# Altium PCB Counters.PcbDoc
Units mm, origin at the board's own origin, x right, y up, seen from the top; angles counter-clockwise.
Board outline 100 x 100 mm, 2 copper layers (Top Layer, Bottom Layer); 41 components, 34 nets, 238 pads, 58 vias.
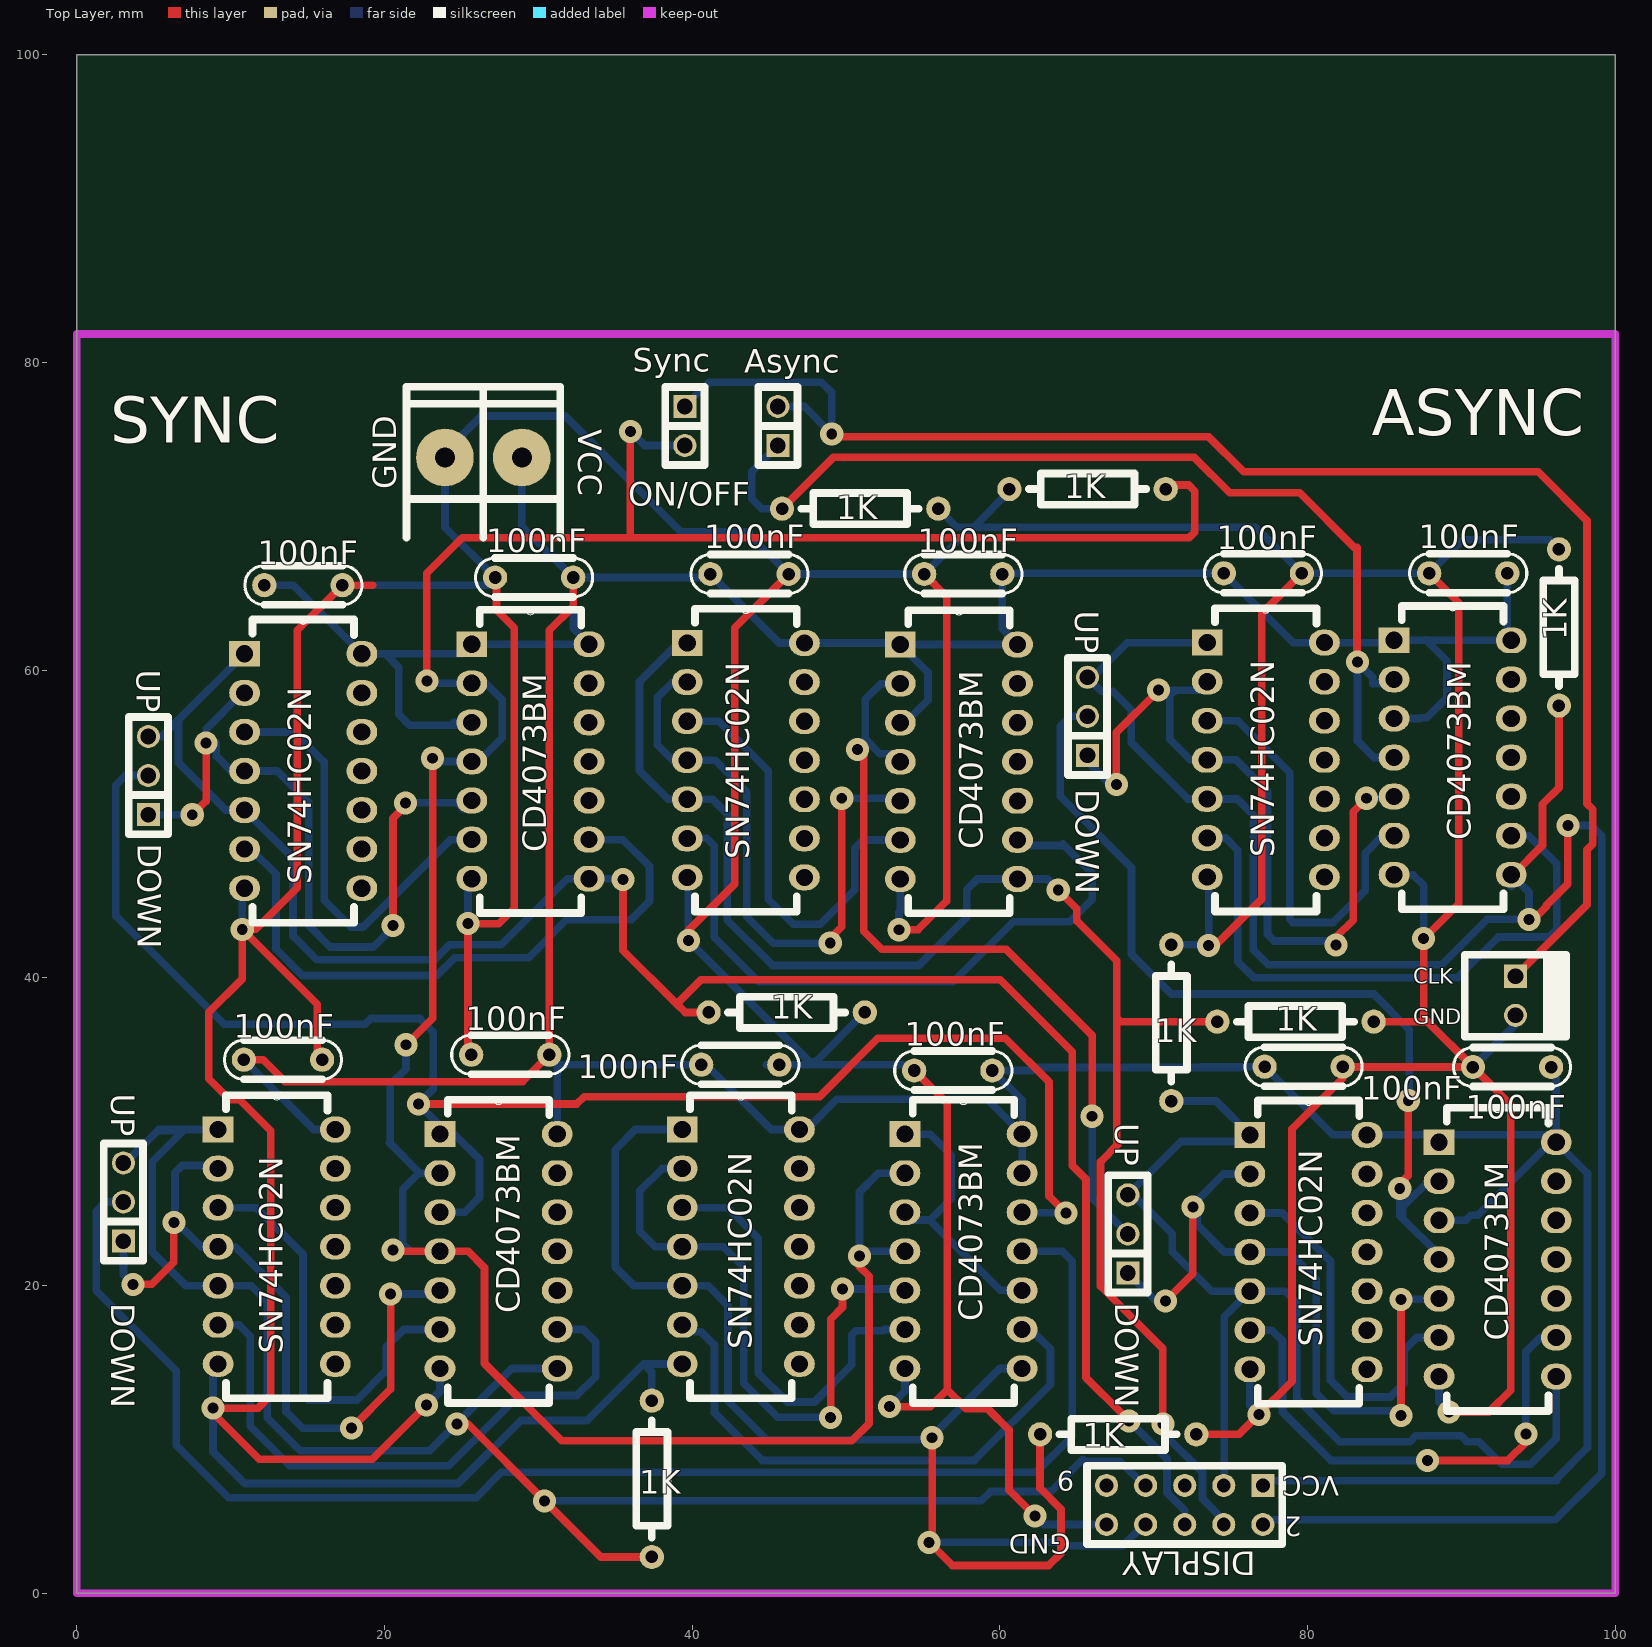
[diagram p0: Top Layer view]
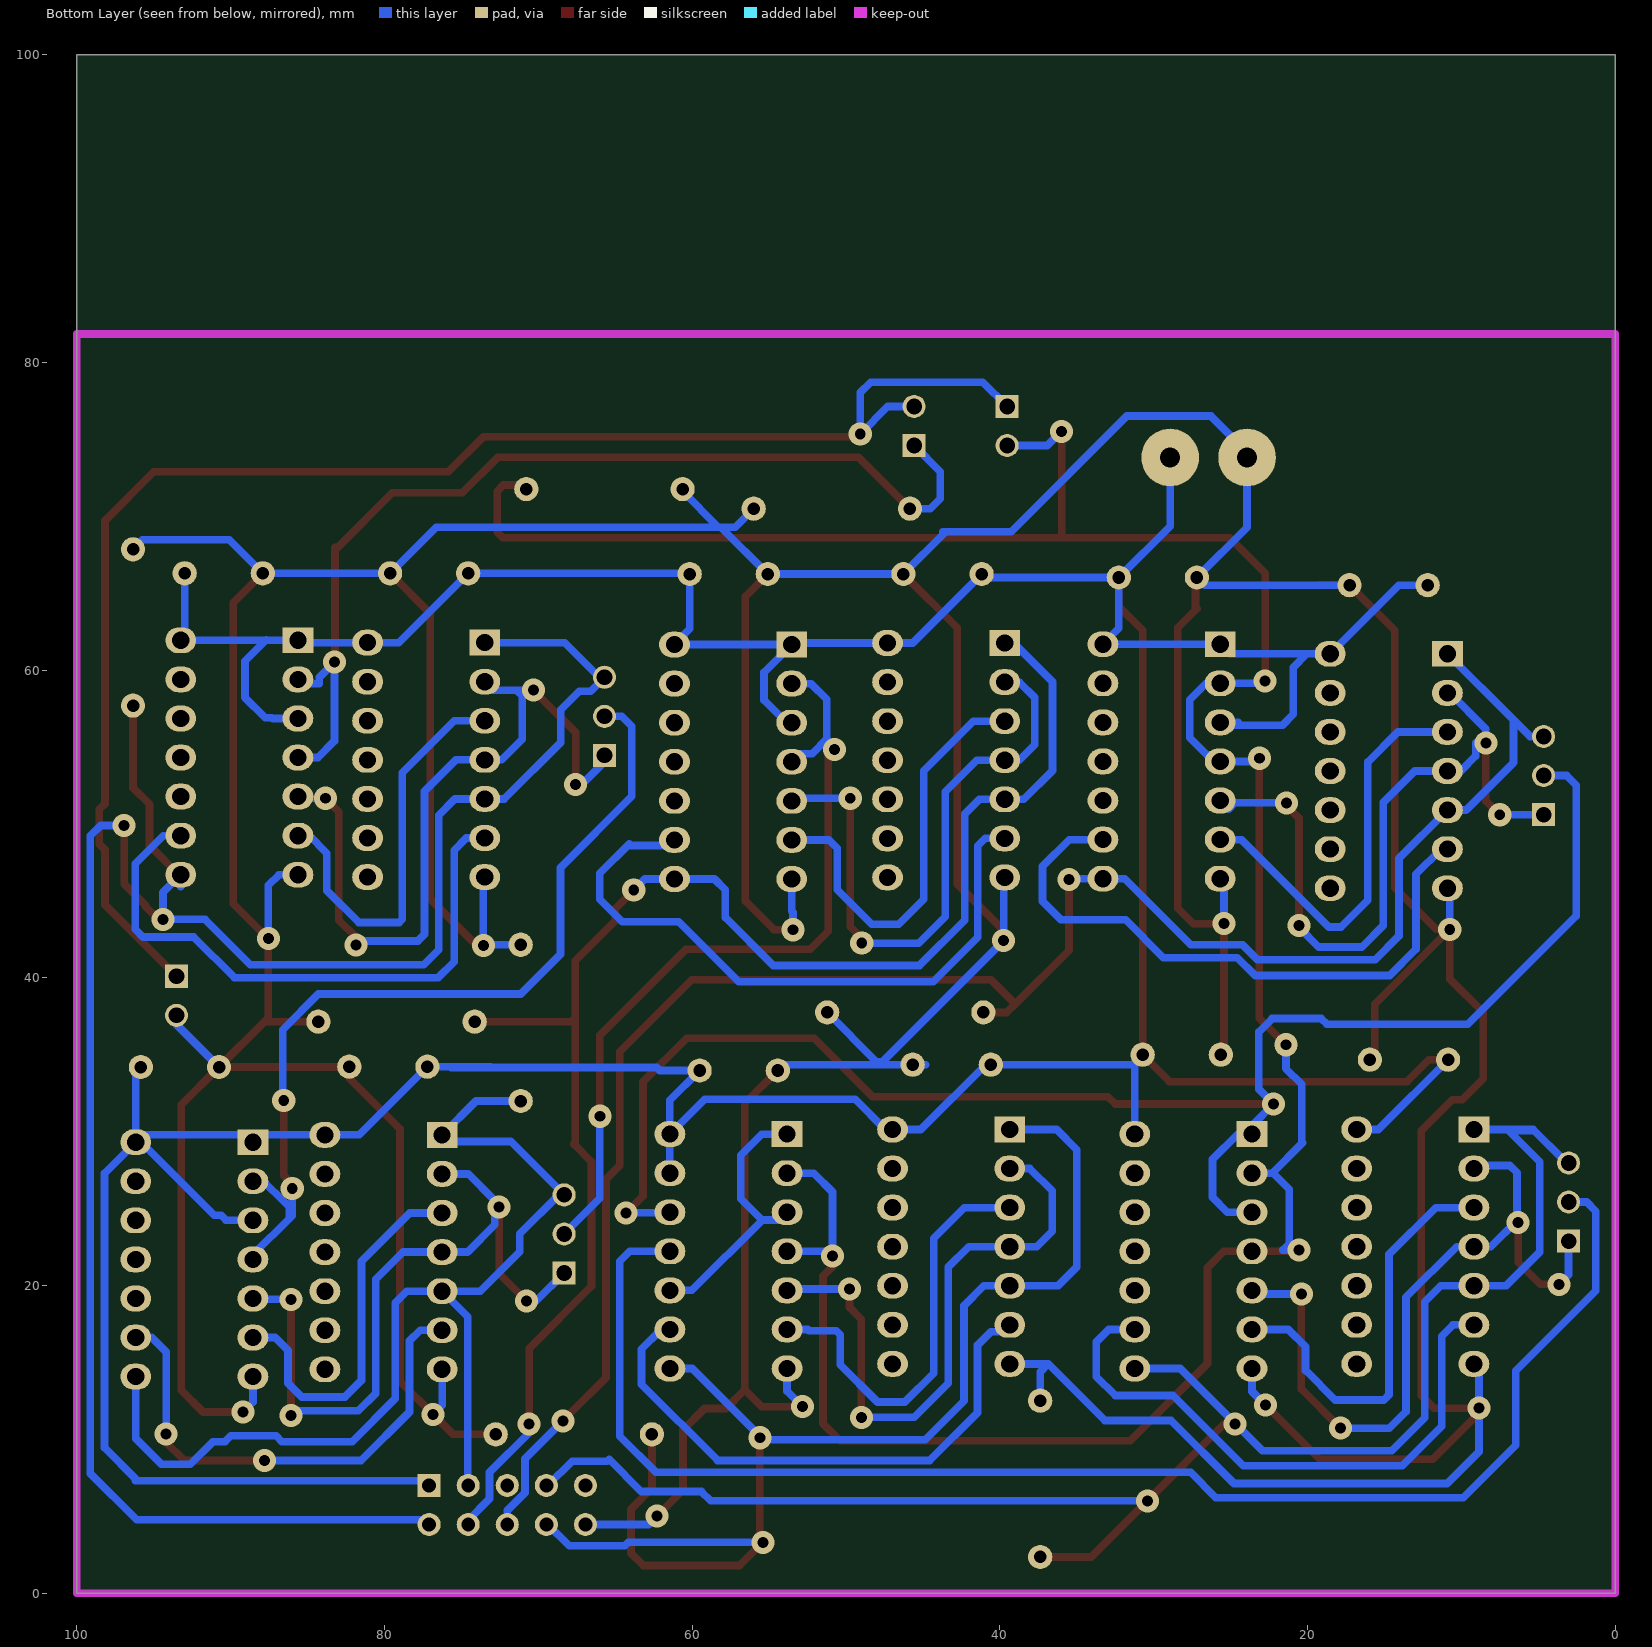
[diagram p1: Bottom Layer view, seen from below]
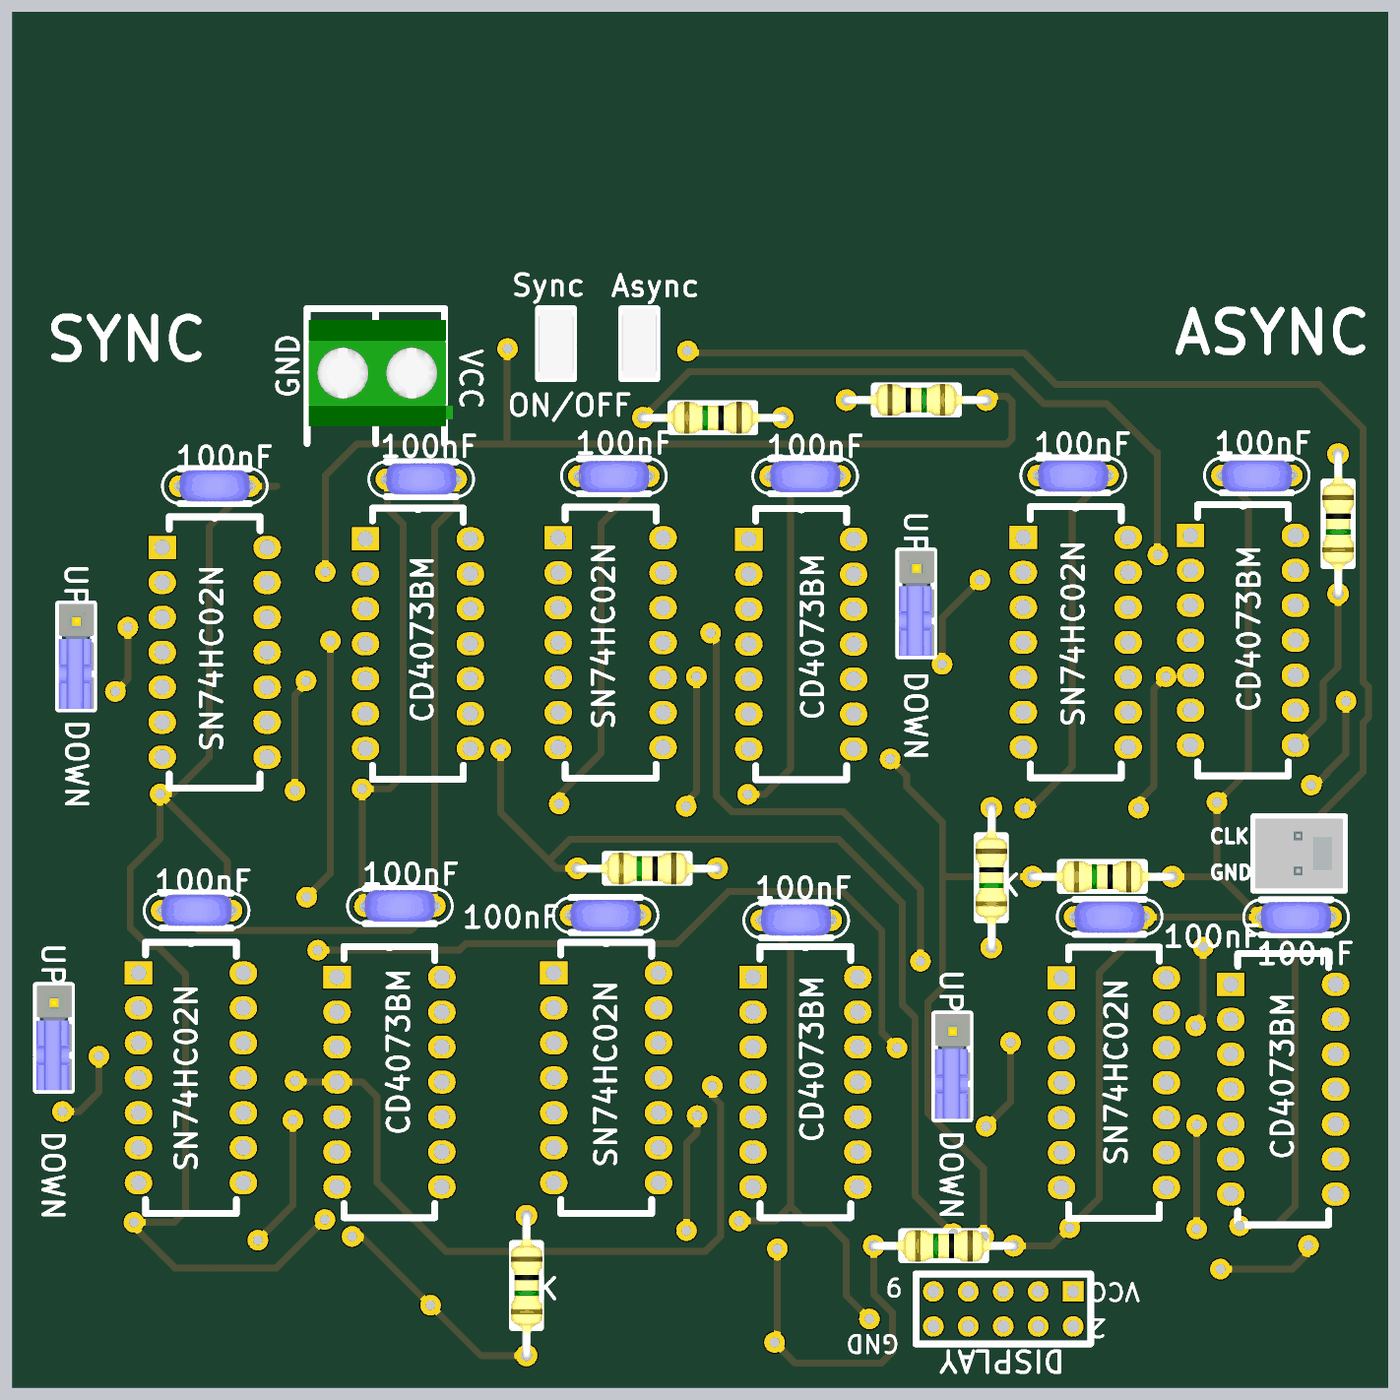
[diagram p2: 3D render of the assembled board from above, using the file's embedded part models]

## Layer stack, top to bottom
Top Solder: solder mask 0.0102, Solder Resist, Dk 3.5
Top Layer: signal copper 0.0356
Dielectric 1: dielectric 0.32, FR-4, Dk 4.8
Bottom Layer: signal copper 0.0356
Bottom Solder: solder mask 0.0102, Solder Resist, Dk 3.5

## Board outline
0,0 0,100 100,100 100,0

## Design rules (kind name [scope] priority, off if disabled: settings)
Clearance [All] p1: gap=0.254 ignorepadtopadclearanceinfootprint=FALSE except(0: Arc-Hole Track-Hole SMDPad-Hole THPad-Hole Via-Hole Fill-Hole Poly-Hole Region-Hole Text-Hole)
PolygonConnect [All] p1: connectstyle=Relief reliefconductorwidth=0.254 reliefentries=4 polygonreliefangle="90 Angle" airgapwidth=0.254
RoutingVias [All] p1: holewidth=0.711 width=1.27 viastyle="Through Hole" minholewidth=0.711 minwidth=1.27 maxholewidth=0.711 maxwidth=1.27
SolderMaskExpansion [All] p1: expansion=0.102
Width [All] p1: maxlimit=0.6 minlimit=0.3 preferedwidth=0.4
30 further rules are at their usual default settings.

## Classes and differential pairs
component class Counters: 1K DISPLAY VCC
component class U_JK_FF1: CD4073BM SN74HC02N
component class U_Sync: UP UP-COUNT
channel class JK_FF: U_JK_FF1 U_JK_FF2 U_JK_FF3 U_JK_FF4 U_JK_FF5

## Components (designator, comment, footprint, x,y, rotation, side; value= is the part's Value field where it differs from the comment)
1K "RES" RES400 56,70.5 r180 top (schematic designator R1)
1K "RES" RES400 60.625,71.775 r0 top (schematic designator R2)
1K "RES" RES400 96.35,67.86 r270 top (schematic designator R3)
1K "RES" RES400 71.15,42.15 r270 top (schematic designator R4)
1K "RES" RES400 84.3,37.15 r180 top (schematic designator R5)
1K "RES" RES400 51.225,37.75 r180 top (schematic designator R6)
1K "RES" RES400 37.375,12.51 r270 top (schematic designator R7)
1K "RES" RES400 72.775,10.325 r180 top (schematic designator R8)
100nF "CAP" CAP200 29.725,66.025 r180 top (schematic designator CAP_D1)
100nF "CAP" CAP200 28.175,35 r180 top (schematic designator CAP_D1)
100nF "CAP" CAP200 77.1,66.3 r0 top (schematic designator CAP_D1)
100nF "CAP" CAP200 79.75,34.225 r0 top (schematic designator CAP_D1)
100nF "CAP" CAP200 43.725,66.25 r0 top (schematic designator CAP_D1)
100nF "CAP" CAP200 14.725,65.525 r180 top (schematic designator CAP_D2)
100nF "CAP" CAP200 13.4,34.675 r180 top (schematic designator CAP_D2)
100nF "CAP" CAP200 90.45,66.3 r0 top (schematic designator CAP_D2)
100nF "CAP" CAP200 93.3,34.2 r0 top (schematic designator CAP_D2)
100nF "CAP" CAP200 57.625,66.25 r0 top (schematic designator CAP_D2)
100nF "CAP" CAP200 56.975,33.975 r180 top (schematic designator CAP_D3)
100nF "CAP" CAP200 43.125,34.35 r0 top (schematic designator CAP_D4)
Async "JUMPER" JUMPER2 45.575,75.875 r90 top (schematic designator J1)
CD4073BM "CD4073BM" *SOIC127P600X175-14N 33.296,46.446 r0 top (schematic designator AND1)
CD4073BM "CD4073BM" *SOIC127P600X175-14N 31.225,14.6 r0 top (schematic designator AND1)
CD4073BM "CD4073BM" *SOIC127P600X175-14N 93.25,46.7 r0 top (schematic designator AND1)
CD4073BM "CD4073BM" *SOIC127P600X175-14N 96.175,14.075 r0 top (schematic designator AND1)
CD4073BM "CD4073BM" *SOIC127P600X175-14N 61.15,46.425 r0 top (schematic designator AND1)
CD4073BM "CD4073BM" *SOIC127P600X175-14N 61.45,14.6 r0 top (schematic designator AND2)
CLK "GND" MOLEX2 93.525,40.1 r270 top (schematic designator J1)
DISPLAY "Header 5X2" HDR2X5 77.1,7 r180 top (schematic designator P2)
SN74HC02N "SN74HC02N" *DIP254P762X508-14 18.525,45.825 r0 top (schematic designator NOR1)
SN74HC02N "SN74HC02N" *DIP254P762X508-14 16.8,14.9 r0 top (schematic designator NOR1)
SN74HC02N "SN74HC02N" *DIP254P762X508-14 81.1,46.55 r0 top (schematic designator NOR1)
SN74HC02N "SN74HC02N" *DIP254P762X508-14 83.875,14.55 r0 top (schematic designator NOR1)
SN74HC02N "SN74HC02N" *DIP254P762X508-14 47.3,46.525 r0 top (schematic designator NOR1)
SN74HC02N "SN74HC02N" *DIP254P762X508-14 46.975,14.9 r0 top (schematic designator NOR2)
Sync "JUMPER" JUMPER2 39.525,75.875 r270 top (schematic designator J2)
UP "DOWN" JUMPER3 3.025,25.425 r90 top (schematic designator J4)
UP "DOWN" JUMPER3 4.65,53.15 r90 top (schematic designator J3)
UP "DOWN" JUMPER3 68.325,23.35 r90 top (schematic designator J2)
UP "DOWN" JUMPER3 65.7,57 r90 top (schematic designator J1)
VCC "GND" BORNERA2 26.425,73.825 r270 top

## Footprints (in the part's own frame and the unit in brackets; to place one, negate y for a bottom-side part, rotate by r counter-clockwise, add the part's x,y. Pads: shape width x height; smd on the part's side, far side on the other; paste and mask are expansions set on the pad)
*DIP254P762X508-14 [mil]
  rect 78.74x66 hole 44: 1(-300,600)
  oval 78.74x66 hole 44: 2(-300,500) 3(-300,400) 4(-300,300) 5(-300,200) 6(-300,100) 7(-300,0) 8(0,0) 9(0,100) 10(0,200) 11(0,300) 12(0,400) 13(0,500) 14(0,600)
  silkscreen extent -280,-88 -20,688
*SOIC127P600X175-14N [mil]
  rect 78.74x66 hole 44: 1(-300,600)
  oval 78.74x66 hole 44: 2(-300,500) 3(-300,400) 4(-300,300) 5(-300,200) 6(-300,100) 7(-300,0) 8(0,0) 9(0,100) 10(0,200) 11(0,300) 12(0,400) 13(0,500) 14(0,600)
  silkscreen extent -280,-88 -20,688
BORNERA2 [mm] "Bornera con Tornillos 5mm separación"
  round 3.75 hole 1.3: 1(0,2.5) 2(0,-2.5)
  silkscreen extent -4.6,-5 5.2,5, body extent -3.76,-4.89 3.94,5.61, height 10
CAP200 [mil]
  round 62 hole 32: 1(-100,0) 2(100,0)
  silkscreen extent -150,-50 150,50, body extent -110,-46 110,44, height 246
HDR2X5 [mm] "Connector; Header; 5x2 Position"
  rect 1.5x1.5 hole 0.9: 1(0,0)
  round 1.5 hole 0.9: 2(0,2.54) 3(2.54,0) 4(2.54,2.54) 5(5.08,0) 6(5.08,2.54) 7(7.62,0) 8(7.62,2.54) 9(10.16,0) 10(10.16,2.54)
  silkscreen extent -1.27,-1.27 11.43,3.81
JUMPER2 [mm]
  rect 1.5x1.5 hole 1.016: 1(-1.27,0)
  round 1.5 hole 1.016: 2(1.27,0)
  silkscreen extent -2.54,-1.27 2.54,1.27, body extent -2.46,-1.27 2.54,1.27, height 9.5
JUMPER3 [mm]
  rect 1.5x1.5 hole 1.016: 1(-2.54,0)
  round 1.5 hole 1.016: 2(0,0) 3(2.54,0)
  silkscreen extent -3.81,-1.27 3.81,1.27, body extent -3.81,-1.3 3.81,1.27, height 16.15
MOLEX2 [mm]
  rect 1.5x1.5 hole 1.016: 1(0,0)
  round 1.5 hole 1.016: 2(2.54,0)
  silkscreen extent -1.4,-3.3 3.94,3.3, body extent -1.27,-3.18 3.81,3.18, height 10.74
RES400 [mil]
  round 62 hole 32: 1(0,0) 2(400,0)
  silkscreen extent 50,-40 350,40, body extent -12,-45 412,46, height 96

## Part data
CD4073BM CD4073BM CD4073BM CD4073BM CD4073BM CD4073BM: "IC: digital; AND; Channels: 3; Inputs: 3; CMOS; SMD; SOP1"
CLK: library part MOLEX2
DISPLAY: "Header, 5-Pin, Dual row"
SN74HC02N SN74HC02N SN74HC02N SN74HC02N SN74HC02N SN74HC02N: "IC: digital; Channels: 4; NOR; Inputs: 2; THT; DIP14; Ser"
UP UP UP UP: library part JUMPER3
VCC: library part "BORNERA 2"

## Via types
v1: diameter 1.5, hole 0.711, Top Layer to Bottom Layer, 58 vias

## Nets (pads, with @x,y where several pads share a name; then routed paths per layer and width w, separated by ;. In a path a pad name is that pad's centre, name@x,y a point inside that pad or via, vN(x,y) a via of type N, cw(c..) or ccw(c..) an arc to the next point about the centre after c; other vN are vias at no path point)
GND: 1K.1 100nF.1@15.94,34.675 100nF.1@17.265,65.525 100nF.1@55.085,66.25 100nF.1@87.91,66.3 100nF.1@90.76,34.2 100nF.2@25.635,35 100nF.2@27.185,66.025 100nF.2@45.665,34.35 100nF.2@46.265,66.25 100nF.2@54.435,33.975 100nF.2@79.64,66.3 100nF.2@82.29,34.225 CD4073BM.7 CLK.2 DISPLAY.10 SN74HC02N.7 VCC.2 | length 568.7
  Top Layer w0.5: v1@8.725,11.825 11.85,8.7 19.2,8.7 v1(22.725,12.225) ; v1(8.85,12.025) 11.775,12.025 12.6,12.85 12.6,30.05 10.575,32.075 9.95,32.075 8.575,33.45 8.575,37.75 10.75,39.925 v1(10.75,43.15) ; 100nF.1@15.94,34.675 15.625,34.99 15.625,38.275 v1(10.75,43.15) ; 19.225,65.525 17.265,65.525 14.325,62.585 14.325,45.85 11.625,43.15 v1(10.75,43.15) ; 100nF.2@25.425,34.735 v1(25.425,43.525) 27.425,43.525 28.425,44.525 28.425,62.75 27.185,63.99 ; 27.275,64.05 100nF.2@27.275,66.085 ; v1(39.75,42.425) 39.75,43.075 42.775,46.1 42.775,62.76 100nF.2@46.265,66.25 ; v1(52.825,12.125) 55.475,12.125 56.575,13.225 ; v1(53.45,43.125) 54.675,43.125 56.55,45 56.55,64.785 100nF.1@55.085,66.25 ; 100nF.2@54.435,33.975 56.575,31.835 56.575,13.225 ; v1(62.3,5) 60.6,6.7 60.6,10.6 59.2,12 57.8,12 56.575,13.225 ; 1K.1@72.775,10.325 75.55,10.325 v1(76.85,11.625) 79,13.775 79,30.175 82.29,33.465 82.29,34.225 82.315,34.2 100nF.1@90.76,34.2 ; v1(73.575,42.1) 74,42.1 77.025,45.125 77.025,63.685 100nF.2@79.64,66.3 ; 1K.1@84.3,37.15 87.79,37.15 87.8,37.16 ; 100nF.1@87.91,66.3 89.825,64.385 89.825,44.825 v1(87.55,42.55) 87.55,37.41 87.8,37.16 ; v1(89.2,11.775) 91.8,11.775 93.225,13.2 93.225,31.735 100nF.1@90.76,34.2 ; 87.8,37.16 100nF.1@90.76,34.2
  Bottom Layer w0.5: SN74HC02N.7@9.18,14.9 8.85,14.57 v1(8.85,12.025) 8.85,9.2 10.925,7.125 24.775,7.125 28.875,11.225 33.175,11.225 36.85,14.9 ; v1(10.75,43.15) 10.75,45.67 SN74HC02N.7@10.905,45.825 ; 100nF.1@17.265,65.525 26.685,65.525 27.185,66.025 23.925,69.285 VCC.2 23.925,74.175 26.275,76.525 31.75,76.525 39.268,69.007 43.692,69.007 43.6,68.915 46.265,66.25 55.085,66.25 58.135,69.3 ; v1(22.725,12.225) 23.605,13.105 CD4073BM.7@23.605,14.6 ; v1(25.425,43.525) 25.425,46.195 CD4073BM.7@25.676,46.446 ; 1K.1@37.375,12.51 37.375,14.375 36.85,14.9 ; SN74HC02N.7@39.355,14.9 36.85,14.9 ; SN74HC02N.7@39.68,46.525 39.75,46.455 v1(39.75,42.425) 47.625,34.55 48.025,34.55 1K.1@51.225,37.75 ; 44.825,34.35 45.665,34.35 54.06,34.35 100nF.2@54.435,33.975 ; v1(52.825,12.125) 53.83,13.13 CD4073BM.7@53.83,14.6 ; v1(53.45,43.125) 53.45,44.25 53.53,44.33 CD4073BM.7@53.53,46.425 ; 1K.1@56,70.5 57.2,69.3 58.135,69.3 ; 1K.1@60.625,71.775 60.625,71.625 58.3,69.3 ; v1(62.3,5) 62.84,4.46 DISPLAY.10@66.84,4.46 ; 1K.1@71.15,42.15 73.525,42.15 v1(73.575,42.1) SN74HC02N.7@73.575,46.455 ; SN74HC02N.7@76.255,14.55 76.255,12.22 v1(76.85,11.625) ; CD4073BM.7@85.63,46.7 86.855,46.7 87.55,46.005 v1(87.55,42.55) ; CD4073BM.7@88.555,14.075 88.555,12.42 v1(89.2,11.775) v1@89.2,11.875 ; 100nF.1@90.76,34.2 93.525,36.965 CLK.2 ; 1K.1@96.35,67.86 95.735,68.475 90.085,68.475 87.91,66.3 79.64,66.3 76.64,69.3 58.3,69.3 ; 58.135,69.3 58.3,69.3
NetAND1_U_JK_FF1_2: 1K.2@70.785,71.775 CD4073BM.2@23.605,27.3 CD4073BM.2@25.676,59.146 CD4073BM.2@53.83,27.3 CD4073BM.4@23.605,22.22 CD4073BM.4@25.676,54.066 CD4073BM.4@53.83,22.22 Sync.2 | length 185.5
  Top Layer w0.5: v1(20.55,22.3) 20.63,22.22 23.605,22.22 25.43,22.22 26.5,21.15 26.5,14.925 31.525,9.9 50.375,9.9 51.5,11.025 51.5,20.6 50.875,21.225 v1(50.875,21.925) ; v1(21.4,35.65) 23.125,37.375 v1(23.125,54.275) ; v1(22.75,59.3) 22.75,66.3 25.05,68.6 35.975,68.6 ; v1@35.975,75.35 35.975,68.6 ; 1K.2@70.675,71.525 71.19,72.04 72.275,72.04 72.675,71.64 72.675,68.975 72.3,68.6 35.975,68.6
  Bottom Layer w0.5: 20.325,29.275 22.3,27.3 ; 20.375,29.275 20.375,33.075 21.4,34.1 v1(21.4,35.65) ; v1(20.55,22.3) 21.6,22.3 21.175,22.725 21.175,26.25 22.225,27.3 22.3,27.3 ; v1(22.75,59.3) 22.904,59.146 25.676,59.146 26.579,59.146 27.65,58.075 27.65,55.6 26.116,54.066 25.676,54.066 v1@23.091,54.066 ; CD4073BM.2@23.605,27.3 22.3,27.3 ; v1(36,75.525) 36.92,74.605 Sync.2 ; v1(50.875,21.925) 50.875,26.075 52.1,27.3 CD4073BM.2@53.83,27.3 ; v1@51.055,22.22 CD4073BM.4@53.83,22.22
NetAND1_U_JK_FF1_5: CD4073BM.5@25.676,51.526 SN74HC02N.2@10.905,58.525 SN74HC02N.4@10.905,53.445 UP.1@4.65,50.61 | length 48.1
  Top Layer w0.5: v1(7.5,50.6) 8.4,51.5 v1(8.4,55.275) ; v1(20.55,43.4) 20.55,50.375 v1@21.45,51.275
  Bottom Layer w0.5: UP.1@4.65,50.61 4.66,50.6 v1(7.5,50.6) ; v1(8.4,55.275) 8.4,56.175 10.75,58.525 SN74HC02N.2@10.905,58.525 ; v1@9.05,55.275 9.05,54.425 10.03,53.445 10.905,53.445 13.03,53.445 15.075,51.4 15.075,43.4 16.475,42 19.275,42 20.55,43.275 v1(20.55,43.4) ; v1(21.35,51.375) 24.725,51.375 25.125,50.975 CD4073BM.5@25.676,51.526
NetAND1_U_JK_FF1_6: CD4073BM.6@25.676,48.986 SN74HC02N.3@10.905,55.985 | length 27.6
  Bottom Layer w0.5: SN74HC02N.3@10.905,55.985 14.115,55.985 16.075,54.025 16.075,45.05 17.825,43.3 18.6,43.3 24.286,48.986 CD4073BM.6@25.676,48.986
NetAND1_U_JK_FF1_8: 1K.2@41.065,37.75 CD4073BM.8@33.296,46.446 DISPLAY.6 SN74HC02N.1@10.905,61.065 SN74HC02N.5@10.905,50.905 UP.3@4.65,55.69 | length 124
  Top Layer w0.5: v1(35.5,46.4) 35.5,41.8 39,38.3 ; 1K.2@41.065,37.75 39.55,37.75 39,38.3 ; v1@67.95,11.65 65.6,14 65.6,26.9 64.7,27.8 64.7,35.2 60.025,39.875 40.575,39.875 39,38.3
  Bottom Layer w0.5: UP.3@4.65,55.69 5.53,55.69 6.6,56.76 ; SN74HC02N.1@10.905,61.065 6.6,56.76 ; v1(35.5,46.4) 35.454,46.446 33.296,46.446 31.871,46.446 27.575,42.15 24.225,42.15 23.25,41.175 15.6,41.175 14.05,42.725 14.05,47.76 10.905,50.905 9.695,50.905 6.6,54 6.6,56.76 ; v1@68.4,11.1 v1(68.4,11.2) 70.866,8.734 70.866,6.522 72.02,5.368 DISPLAY.6
NetAND1_U_JK_FF1_9: CD4073BM.9@33.296,48.986 SN74HC02N.6@10.905,48.365 | length 41.5
  Bottom Layer w0.5: SN74HC02N.6@10.905,48.365 11.31,48.365 12.95,46.725 12.95,41.85 14.65,40.15 23.4,40.15 24.563,41.313 29.363,41.313 31.825,43.775 36.025,43.775 37.225,44.975 37.225,47.25 35.489,48.986 CD4073BM.9@33.296,48.986
NetAND1_U_JK_FF2_1: CD4073BM.1@23.605,29.84 CD4073BM.3@23.605,24.76 CD4073BM.12@61.45,24.76 UP.2@4.65,53.15 | length 106.7
  Top Layer w0.5: v1(22.2,31.8) 32.5,31.8 32.975,32.275 48.275,32.275 52.075,36.075 60.35,36.075 63.2,33.225 63.2,25.8 v1(64.3,24.7)
  Bottom Layer w0.5: UP.2@4.65,53.15 3.15,53.15 2.525,52.525 2.525,44.025 9.575,36.975 18.725,36.975 19.1,37.35 22.3,37.35 23.175,36.475 23.175,32.775 v1(22.2,31.8) 23.605,30.395 23.605,29.84 24.535,29.84 26.175,28.2 26.175,25.725 25.21,24.76 CD4073BM.3@23.605,24.76 ; CD4073BM.12@61.45,24.76 61.485,24.725 v1@63.9,24.725
NetAND1_U_JK_FF2_5: CD4073BM.5@23.605,19.68 SN74HC02N.2@9.18,27.6 SN74HC02N.4@9.18,22.52 UP.1@3.025,22.885 | length 49.8
  Top Layer w0.5: v1(3.65,20.075) 4.875,20.075 6.3,21.5 v1(6.3,24.1) ; v1(17.85,10.725) 20.4,13.275 v1(20.4,19.45) v1@20.55,19.6
  Bottom Layer w0.5: UP.1@3.025,22.885 3.025,20.7 v1(3.65,20.075) ; SN74HC02N.2@9.18,27.6 8.98,27.8 6.85,27.8 6.375,27.325 6.375,24.225 8.08,22.52 9.18,22.52 10.305,22.52 13.6,19.225 13.6,11.8 14.675,10.725 v1(17.85,10.725) ; v1(20.4,19.45) 23.375,19.45 CD4073BM.5@23.605,19.68
NetAND1_U_JK_FF2_6: CD4073BM.6@23.605,17.14 SN74HC02N.3@9.18,25.06 | length 27.8
  Bottom Layer w0.5: SN74HC02N.3@9.18,25.06 11.665,25.06 14.7,22.025 14.7,12.9 15.05,12.55 18.2,12.55 20.125,14.475 20.125,16.025 21.24,17.14 CD4073BM.6@23.605,17.14
NetAND1_U_JK_FF2_8: 1K.2@37.375,2.35 CD4073BM.8@31.225,14.6 DISPLAY.7 SN74HC02N.1@9.18,30.14 SN74HC02N.5@9.18,19.98 UP.3@3.025,27.965 | length 112.6
  Top Layer w0.5: v1(24.7,11) 25.4,11 v1(30.4,6) 34.05,2.35 1K.2@37.375,2.35
  Bottom Layer w0.5: UP.3@3.375,27.965 3.375,28.19 5.25,30.065 ; SN74HC02N.1@9.18,30.14 5.325,30.14 5.25,30.065 ; v1(30.4,6) 58.8,6 59.4,6.6 63.3,6.6 65.4,8.7 65.52,8.58 67.8,8.58 DISPLAY.7@69.38,7 ; CD4073BM.8@31.225,14.6 28.275,14.6 22.925,9.25 14.525,9.25 12.375,11.4 12.375,18.95 11.345,19.98 9.18,19.98 7.095,19.98 4.9,22.175 4.9,28.05 6.915,30.065 5.25,30.065
NetAND1_U_JK_FF2_9: CD4073BM.9@31.225,17.14 SN74HC02N.6@9.18,17.44 | length 39.3
  Bottom Layer w0.5: SN74HC02N.6@9.18,17.44 10.535,17.44 11.275,16.7 11.275,10.85 13.85,8.275 24.175,8.275 28.75,12.85 32.5,12.85 33.725,14.075 33.725,16.325 32.91,17.14 CD4073BM.9@31.225,17.14
NetAND1_U_JK_FF3_2: 1K.2@45.84,70.5 Async.1 CD4073BM.2@85.63,59.4 CD4073BM.4@85.63,54.32 | length 66
  Top Layer w0.5: 1K.2@45.84,70.5 49.19,73.85 72.625,73.85 74.95,71.525 79.5,71.525 83.05,67.975 83.225,67.975 v1@83.225,60.8
  Bottom Layer w0.5: Async.1 43.875,72.905 43.875,71.15 44.525,70.5 1K.2@45.84,70.5 ; CD4073BM.4@85.63,54.32 84.33,54.32 83.25,55.4 v1(83.25,60.525) 84.25,59.525 84.25,59.125 85.355,59.125 CD4073BM.2@85.63,59.4
NetAND1_U_JK_FF3_5: CD4073BM.5@85.63,51.78 SN74HC02N.2@73.48,59.25 SN74HC02N.4@73.48,54.17 UP.1@65.7,54.46 | length 50.7
  Top Layer w0.5: v1(67.575,52.575) 67.575,55.95 v1(70.325,58.7) ; v1(81.85,42.125) 81.85,42.625 82.975,43.75 82.975,50.8 v1(83.85,51.675)
  Bottom Layer w0.5: UP.1@65.7,54.46 65.7,54.05 v1@67.475,52.275 ; v1(70.325,58.7) 71.425,58.7 ; SN74HC02N.2@73.48,59.25 72.93,58.7 71.425,58.7 ; v1@81.825,42.4 77.825,42.4 77.4,42.825 77.4,52.125 75.355,54.17 73.48,54.17 72.38,54.17 71.05,55.5 71.05,58.325 71.425,58.7 ; v1(83.85,51.675) CD4073BM.5@85.63,51.675
NetAND1_U_JK_FF3_6: CD4073BM.6@85.63,49.24 SN74HC02N.3@73.48,56.71 | length 26.9
  Bottom Layer w0.5: SN74HC02N.3@73.48,56.71 75.465,56.71 78.85,53.325 78.85,43.8 79.05,43.6 81.675,43.6 83.75,45.675 83.75,48.1 84.94,49.29 CD4073BM.6@85.63,49.29
NetAND1_U_JK_FF3_8: 1K.2@96.35,57.7 CD4073BM.8@93.25,46.7 DISPLAY.2 SN74HC02N.1@73.48,61.79 SN74HC02N.5@73.48,51.63 UP.3@65.7,59.54 | length 143.7
  Top Layer w0.5: CD4073BM.8@93.25,46.7 93.375,46.7 95.275,48.6 95.275,51.275 96.35,52.35 1K.2@96.35,57.7 ; v1@94.55,43.65 95.562,44.663 95.525,44.7 96.925,46.1 v1(96.925,49.9)
  Bottom Layer w0.5: SN74HC02N.1@73.48,61.79 68.29,61.79 66.04,59.54 65.7,59.54 66.605,58.635 67.34,58.635 68.55,57.425 68.55,55.3 72.22,51.63 73.48,51.63 75.42,51.63 76.475,50.575 76.475,41.825 77.45,40.85 88.725,40.85 91.675,43.8 v1(94.4,43.8) 94.4,45.55 93.25,46.7 CD4073BM.8@93.25,45.925 ; DISPLAY.2@77.1,4.76 96.11,4.76 99.125,7.775 99.125,49.225 98.45,49.9 v1(96.925,49.9)
NetAND1_U_JK_FF3_9: CD4073BM.9@93.25,49.24 SN74HC02N.6@73.48,49.09 | length 40
  Bottom Layer w0.5: SN74HC02N.6@73.48,49.09 74.685,49.09 75.475,48.3 75.475,41.05 76.525,40 89.75,40 92.4,42.65 95.7,42.65 96.212,43.163 96.212,47.413 94.385,49.24 CD4073BM.9@93.25,49.24
NetAND1_U_JK_FF4_2: CD4073BM.2@88.555,26.775 CD4073BM.4@88.555,21.695 UP.2@65.7,57 | length 57.8
  Top Layer w0.5: v1(86,26.3) 86,26.6 86.55,27.15 v1(86.55,32.025)
  Bottom Layer w0.5: UP.2@65.7,57 64.575,57 63.925,56.35 63.925,51.8 68.563,47.162 68.563,41.537 71.15,38.95 84.3,38.95 86.625,36.625 v1@86.625,32.55 ; v1(86,26.3) 86,24.55 86.175,24.375 ; CD4073BM.2@88.2,27.1 86.175,25.075 86.175,24.375 ; CD4073BM.4@88.53,22.02 86.175,24.375
NetAND1_U_JK_FF4_5: CD4073BM.5@88.555,19.155 SN74HC02N.2@76.255,27.25 SN74HC02N.4@76.255,22.17 UP.1@68.325,20.81 | length 48.5
  Top Layer w0.5: v1(70.775,19) 72.55,20.775 v1(72.55,25.1) ; v1(86.075,11.55) v1(86.075,19.1)
  Bottom Layer w0.5: UP.1@68.325,20.81 70.135,19 v1(70.775,19) ; SN74HC02N.2@76.255,27.25 74.55,27.25 72.825,25.525 72.825,23.95 74.605,22.17 76.255,22.17 78.805,22.17 80.575,20.4 80.575,12.975 81.7,11.85 85.775,11.85 v1(86.075,11.55) ; v1(86.075,19.1) 88.5,19.1 CD4073BM.5@88.555,19.155
NetAND1_U_JK_FF4_6: CD4073BM.6@88.555,16.615 SN74HC02N.3@76.255,24.71 | length 24.6
  Bottom Layer w0.5: SN74HC02N.3@76.255,24.71 78.365,24.71 81.5,21.575 81.5,13.825 82.575,12.75 85.375,12.75 86.275,13.65 86.275,15.775 87.115,16.615 CD4073BM.6@88.555,16.615
NetAND1_U_JK_FF4_8: 1K.2@71.15,31.99 CD4073BM.8@96.175,14.075 DISPLAY.3 SN74HC02N.1@76.255,29.79 SN74HC02N.5@76.255,19.63 UP.3@68.325,25.89 | length 72.4
  Bottom Layer w0.5: 1K.2@71.15,31.99 74.055,31.99 SN74HC02N.1@76.255,29.79 ; DISPLAY.3@74.6,7.3 74.6,17.975 SN74HC02N.5@76.255,19.63 ; SN74HC02N.1@75.83,29.365 71.8,29.365 68.325,25.89 68.66,25.89 71.2,23.35 71.2,22.2 73.77,19.63 SN74HC02N.5@76.255,19.63 ; CD4073BM.8@96.175,14.075 96.175,10.05 94.5,8.375 92.625,8.375 91.15,9.85 90.375,9.85 90,10.225 87.05,10.225 86.675,9.85 82.1,9.85 79.3,12.65 79.3,18.875 78.545,19.63 SN74HC02N.5@76.255,19.63
NetAND1_U_JK_FF4_9: CD4073BM.9@96.175,16.615 SN74HC02N.6@76.255,17.09 | length 32.4
  Top Layer w0.5: v1(87.8,8.625) 93.025,8.625 v1@94.25,9.85
  Bottom Layer w0.5: SN74HC02N.6@76.255,17.09 77.685,17.09 78.375,16.4 78.375,11.775 81.525,8.625 v1(87.8,8.625) ; v1(94.2,10.35) 94.2,15.675 95.14,16.615 CD4073BM.9@96.175,16.615
NetAND1_U_JK_FF5_2: CD4073BM.2@53.53,59.125 CD4073BM.4@53.53,54.045 UP.2@68.325,23.35 | length 52.6
  Top Layer w0.5: v1(50.75,54.85) 51.15,54.45 51.15,43.025 52.325,41.85 60.4,41.85 66,36.25 v1(66,31)
  Bottom Layer w0.5: v1(50.75,54.85) 50.75,55.025 51.25,55.525 ; CD4073BM.4@53.53,54.045 53,54.575 52.2,54.575 51.25,55.525 ; CD4073BM.2@53.53,59.125 52.275,59.125 51.25,58.1 51.25,55.525 ; v1(66,31) 66,25.675 UP.2@68.325,23.35
NetAND1_U_JK_FF5_5: CD4073BM.5@53.53,51.505 SN74HC02N.2@39.68,59.225 SN74HC02N.4@39.68,54.145 | length 40.5
  Top Layer w0.5: v1(48.975,42.25) 48.975,42.575 49.725,43.325 v1(49.725,51.675)
  Bottom Layer w0.5: SN74HC02N.2@39.68,59.225 38.725,59.225 37.725,58.225 37.725,55.15 38.73,54.145 39.68,54.145 41.505,54.145 43.55,52.1 43.55,43.975 45.275,42.25 v1(48.975,42.25) ; v1(49.725,51.675) 53.1,51.675 53.4,51.375 CD4073BM.5@53.53,51.505
NetAND1_U_JK_FF5_6: CD4073BM.6@53.53,48.965 SN74HC02N.3@39.68,56.685 | length 28.1
  Bottom Layer w0.5: SN74HC02N.3@39.68,56.685 41.715,56.685 44.95,53.45 44.95,45.1 46.575,43.475 48.325,43.475 50.575,45.725 50.575,48.425 51.115,48.965 CD4073BM.6@53.53,48.965
NetAND1_U_JK_FF5_8: 1K.2@74.14,37.15 CD4073BM.8@61.15,46.425 DISPLAY.4 SN74HC02N.1@39.68,61.765 SN74HC02N.5@39.68,51.605 | length 103.5
  Top Layer w0.5: v1(63.8,45.7) 65,44.5 65,43.7 67.6,41.1 67.6,37.4 ; 67.6,29.1 67.6,37.4 ; 67.7,29.2 66.55,28.05 66.55,19.95 70.6,15.9 v1(70.6,11) ; 1K.2@74.14,37.15 67.85,37.15 67.6,37.4
  Bottom Layer w0.5: SN74HC02N.1@39.68,61.765 39.09,61.765 36.575,59.25 36.575,53.475 38.445,51.605 39.68,51.605 41.32,51.605 42.275,50.65 42.275,43.75 45.225,40.8 54.725,40.8 57.85,43.925 57.85,45.725 58.55,46.425 61.15,46.425 63.075,46.425 v1(63.8,45.7) ; v1(70.6,11) 70.6,10.426 73.174,7.852 73.174,6.126 74.56,4.74 DISPLAY.4
NetAND1_U_JK_FF5_9: CD4073BM.9@61.15,48.965 SN74HC02N.6@39.68,49.065 | length 43.4
  Bottom Layer w0.5: SN74HC02N.6@39.68,49.065 40.935,49.065 41.425,48.575 41.425,42.65 44.325,39.75 56.975,39.75 60.875,43.65 64.55,43.65 66,45.1 66,46.8 64.1,48.7 ; CD4073BM.9@61.285,49.1 61.15,48.965 61.515,48.6 64,48.6
NetAND2_1: CD4073BM.1@53.83,29.84 CD4073BM.3@53.83,24.76 CD4073BM.10@61.45,19.68 | length 18.1
  Bottom Layer w0.5: CD4073BM.3@53.83,24.76 54.34,24.25 55.45,24.25 ; CD4073BM.1@53.83,29.84 55.485,29.84 56.85,28.475 56.85,25.65 55.45,24.25 ; CD4073BM.10@61.45,19.68 60.02,19.68 55.45,24.25
NetAND2_5: CD4073BM.5@53.83,19.68 SN74HC02N.2@39.355,27.6 SN74HC02N.4@39.355,22.52 | length 40.7
  Top Layer w0.5: v1(49,11.425) 49,17.8 49.775,18.575 v1(49.775,19.775)
  Bottom Layer w0.5: SN74HC02N.2@39.355,27.6 38.05,27.6 36.6,26.15 36.6,23.525 37.605,22.52 39.355,22.52 42.03,22.52 43.35,21.2 43.35,13.65 45.575,11.425 v1(49,11.425) ; v1(49.775,19.775) 53.375,19.775 53.65,19.5 CD4073BM.5@53.83,19.68
NetAND2_6: CD4073BM.6@53.83,17.14 SN74HC02N.3@39.355,25.06 | length 27.9
  Bottom Layer w0.5: SN74HC02N.3@39.355,25.06 42.315,25.06 44.3,23.075 44.3,14.3 46.175,12.425 47.95,12.425 50.375,14.85 50.375,16.8 50.64,17.065 52.405,17.065 52.48,17.14 CD4073BM.6@53.83,17.14
NetAND2_8: 1K.2@62.615,10.325 CD4073BM.8@61.45,14.6 DISPLAY.8 SN74HC02N.1@39.355,30.14 SN74HC02N.5@39.355,19.98 | length 88.3
  Top Layer w0.5: v1(55.6,10.1) 55.6,3.5 v1(55.4,3.3) 56.9,1.8 63.175,1.8 63.975,2.6 63.975,5.45 62.615,6.81 1K.2@62.615,10.325
  Bottom Layer w0.5: SN74HC02N.1@39.355,30.14 36.31,30.14 35,28.83 35,21.2 36.22,19.98 39.355,19.98 41.045,19.98 42.325,18.7 42.325,12.5 44.85,9.975 v1@55.375,9.975 ; v1(55.4,3.3) 64.16,3.3 64.38,3.08 68,3.08 DISPLAY.8@69.38,4.46 ; v1@55.55,10.15 60,14.6 CD4073BM.8@61.45,14.6
NetAND2_9: CD4073BM.9@61.45,17.14 SN74HC02N.6@39.355,17.44 | length 36.9
  Bottom Layer w0.5: SN74HC02N.6@39.355,17.44 39.795,17 40.575,17 41.45,16.125 41.45,11.725 44.55,8.625 58.35,8.625 63.3,13.575 63.3,15.85 62.01,17.14 CD4073BM.9@61.45,17.14
NetAND2_11: CD4073BM.11@61.45,22.22 UP.2@3.025,25.425 | length 95.6
  Bottom Layer w0.5: UP.2@3.025,25.425 1.85,25.425 1.25,24.825 1.25,19.65 6.45,14.45 6.45,9.625 9.875,6.2 25.95,6.2 27.6,7.85 62.35,7.85 64.7,10.2 64.7,21.57 64.05,22.22 CD4073BM.11@61.45,22.22
NetJ1_1: Async.2 CLK.1 Sync.1 | length 100.7
  Top Layer w0.5: v1@49.075,75.185 73.565,75.185 75.85,72.9 95,72.9 98.175,69.725 98.175,51.325 98.55,50.95 98.55,48.7 98.175,48.325 98.175,44.75 CLK.1
  Bottom Layer w0.5: Sync.1 41.105,78.725 48.4,78.725 49.075,78.05 v1(49.075,75.35) 47.28,77.145 Async.2
VCC: 100nF.1@30.715,35 100nF.1@32.265,66.025 100nF.1@40.585,34.35 100nF.1@41.185,66.25 100nF.1@59.515,33.975 100nF.1@74.56,66.3 100nF.1@77.21,34.225 100nF.2@10.86,34.675 100nF.2@12.185,65.525 100nF.2@60.165,66.25 100nF.2@92.99,66.3 100nF.2@95.84,34.2 CD4073BM.1@25.676,61.686 CD4073BM.1@53.53,61.665 CD4073BM.1@85.63,61.94 CD4073BM.1@88.555,29.315 CD4073BM.3@25.676,56.606 CD4073BM.3@53.53,56.585 CD4073BM.3@85.63,56.86 CD4073BM.3@88.555,24.235 CD4073BM.13@61.45,27.3 CD4073BM.14 DISPLAY.1 SN74HC02N.14 VCC.1 | length 344
  Top Layer w0.5: 100nF.2@10.86,34.675 12.11,34.675 13.535,33.25 28.965,33.25 30.715,35 30.715,62.59 32.265,64.14 100nF.1@32.265,66.025
  Bottom Layer w0.5: 100nF.2@10.86,34.675 15.395,30.14 SN74HC02N.14@16.8,30.14 ; 100nF.2@12.185,65.525 14.065,65.525 18.525,61.065 20.035,61.065 ; 24.494,56.606 25.676,56.606 25.495,56.425 21.625,56.425 20.925,57.125 20.925,60.175 20.035,61.065 ; VCC.1 28.925,69.365 100nF.1@32.265,66.025 ; 100nF.1@30.715,35 31.225,34.49 CD4073BM.14@31.225,29.84 ; 31.365,34.35 40.585,34.35 40.925,34.35 45.135,30.14 46.975,30.14 47.44,30.14 49.4,32.1 59.19,32.1 CD4073BM.14@61.45,29.84 ; CD4073BM.3@53.53,56.585 53.86,56.585 55.325,58.05 55.325,59.87 CD4073BM.1@53.53,61.665 ; CD4073BM.14@61.15,61.665 CD4073BM.1@53.53,61.665 ; CD4073BM.14@61.425,61.44 60.165,62.7 60.165,66.25 60.215,66.3 74.56,66.3 79.07,61.79 81.1,61.79 CD4073BM.1@85.63,61.79 ; CD4073BM.13@61.45,27.3 CD4073BM.14@61.45,29.84 ; 73.11,34.225 77.21,34.225 81.645,29.79 83.875,29.79 CD4073BM.14@96.175,29.79 ; 75.66,34.175 62.315,34.175 62.115,33.975 59.515,33.975 61.45,32.04 CD4073BM.14@61.45,29.84 ; DISPLAY.1@77.1,7.3 96.2,7.3 96.2,7.45 98.2,9.45 98.2,27.29 96.175,29.315 CD4073BM.14@96.175,29.64 ; CD4073BM.3@85.63,56.86 87.275,56.86 87.325,56.91 87.76,56.91 89.075,58.225 89.075,60.575 87.71,61.94 ; CD4073BM.1@85.63,61.94 87.71,61.94 ; 87.688,61.963 87.71,61.94 ; CD4073BM.3@88.555,24.235 90.3,24.235 90.625,24.56 91.06,24.56 96.14,29.64 CD4073BM.14@96.175,29.64 ; CD4073BM.14@92.99,62.2 100nF.2@92.99,66.3 ; CD4073BM.14@93.25,61.94 87.71,61.94 ; 100nF.2@95.84,34.2 96.175,33.865 CD4073BM.14@96.175,29.79 ; 20.035,61.065 25.055,61.065 25.676,61.686 33.296,61.686 32.265,62.717 100nF.1@32.265,66.025 ; 100nF.1@32.265,66.025 40.96,66.025 41.185,66.25 45.67,61.765 47.3,61.765 53.43,61.765 CD4073BM.1@53.53,61.665 ; CD4073BM.14@96.175,29.64 CD4073BM.14@96.175,29.79
pads on no net: CD4073BM.10@31.225,19.68 CD4073BM.10@33.296,51.526 CD4073BM.10@61.15,51.505 CD4073BM.10@93.25,51.78 CD4073BM.10@96.175,19.155 CD4073BM.11@31.225,22.22 CD4073BM.11@33.296,54.066 CD4073BM.11@61.15,54.045 CD4073BM.11@93.25,54.32 CD4073BM.11@96.175,21.695 CD4073BM.12@31.225,24.76 CD4073BM.12@33.296,56.606 CD4073BM.12@61.15,56.585 CD4073BM.12@93.25,56.86 CD4073BM.12@96.175,24.235 CD4073BM.13@31.225,27.3 CD4073BM.13@33.296,59.146 CD4073BM.13@61.15,59.125 CD4073BM.13@93.25,59.4 CD4073BM.13@96.175,26.775 DISPLAY.5 DISPLAY.9 SN74HC02N.8 SN74HC02N.9 SN74HC02N.10 SN74HC02N.11 SN74HC02N.12 SN74HC02N.13

## Keep-outs
Keep-Out Layer:
  lines w0.5: 0,0 100,0 100,81.85 0,81.85 0,0

## Silkscreen, mask and mechanical layers (free items; w line width, h text height)
Top Overlay:
  text "ASYNC" at 84.175,75.275 h3
  text "SYNC" at 2.175,74.775 h3
  text "ON/OFF" at 35.85,70.675 h1.52

## Text inside footprints (layer, text, board x,y; h text height)
DISPLAY: Top Overlay "2" at 79.64,4.968 h1.27 r180; Top Overlay "VCC" at 82.075,7.6 h1.27 r180; Top Overlay "9" at 64.825,7.925 h1.27 r180; Top Overlay "GND" at 64.6,3.825 h1.27 r180